# Altium PCB Control_Test_Board.PcbDoc
Units mil, origin at the board's own origin, x right, y up, seen from the top; angles counter-clockwise.
Board outline 2100 x 1625 mil, 2 copper layers (Top Layer, Bottom Layer); 34 components, 53 nets, 201 pads, 72 vias.
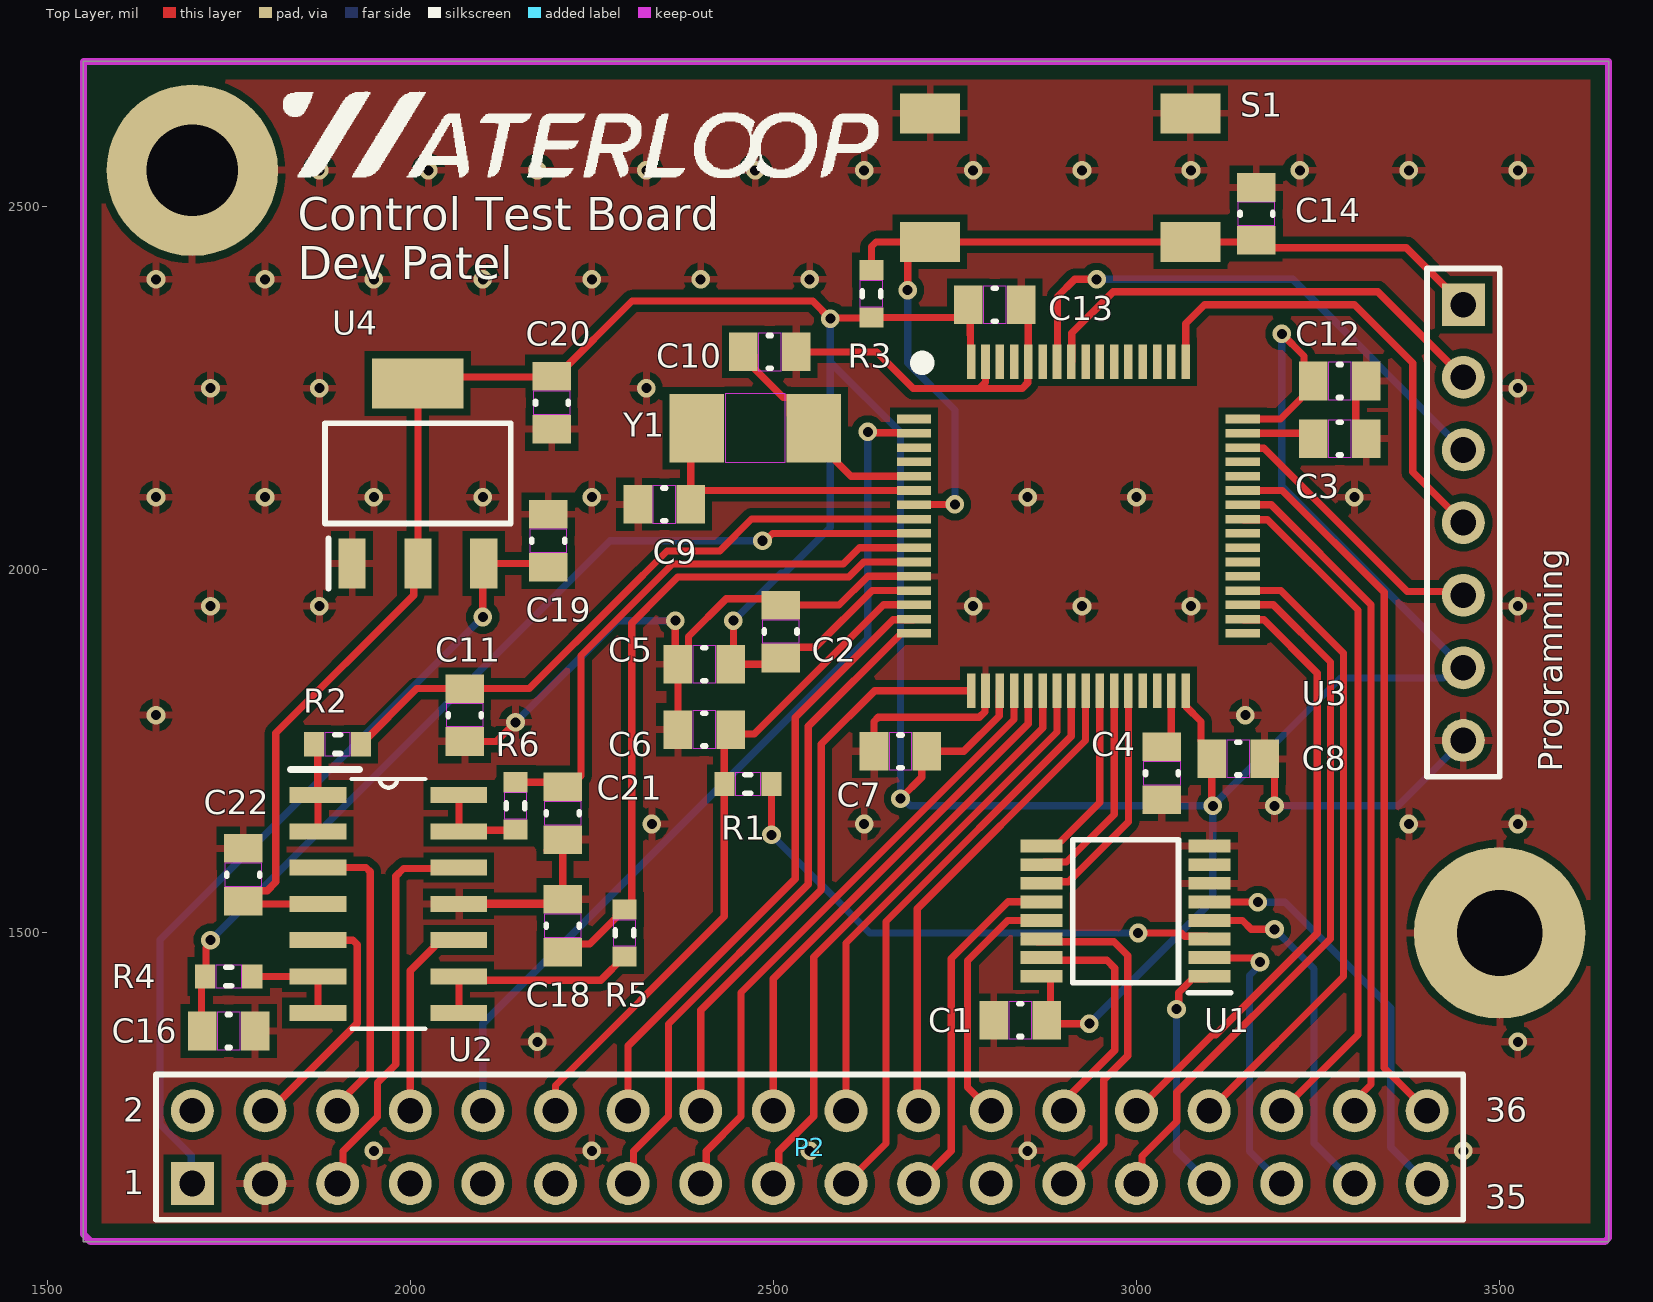
[diagram p0: Top Layer view]
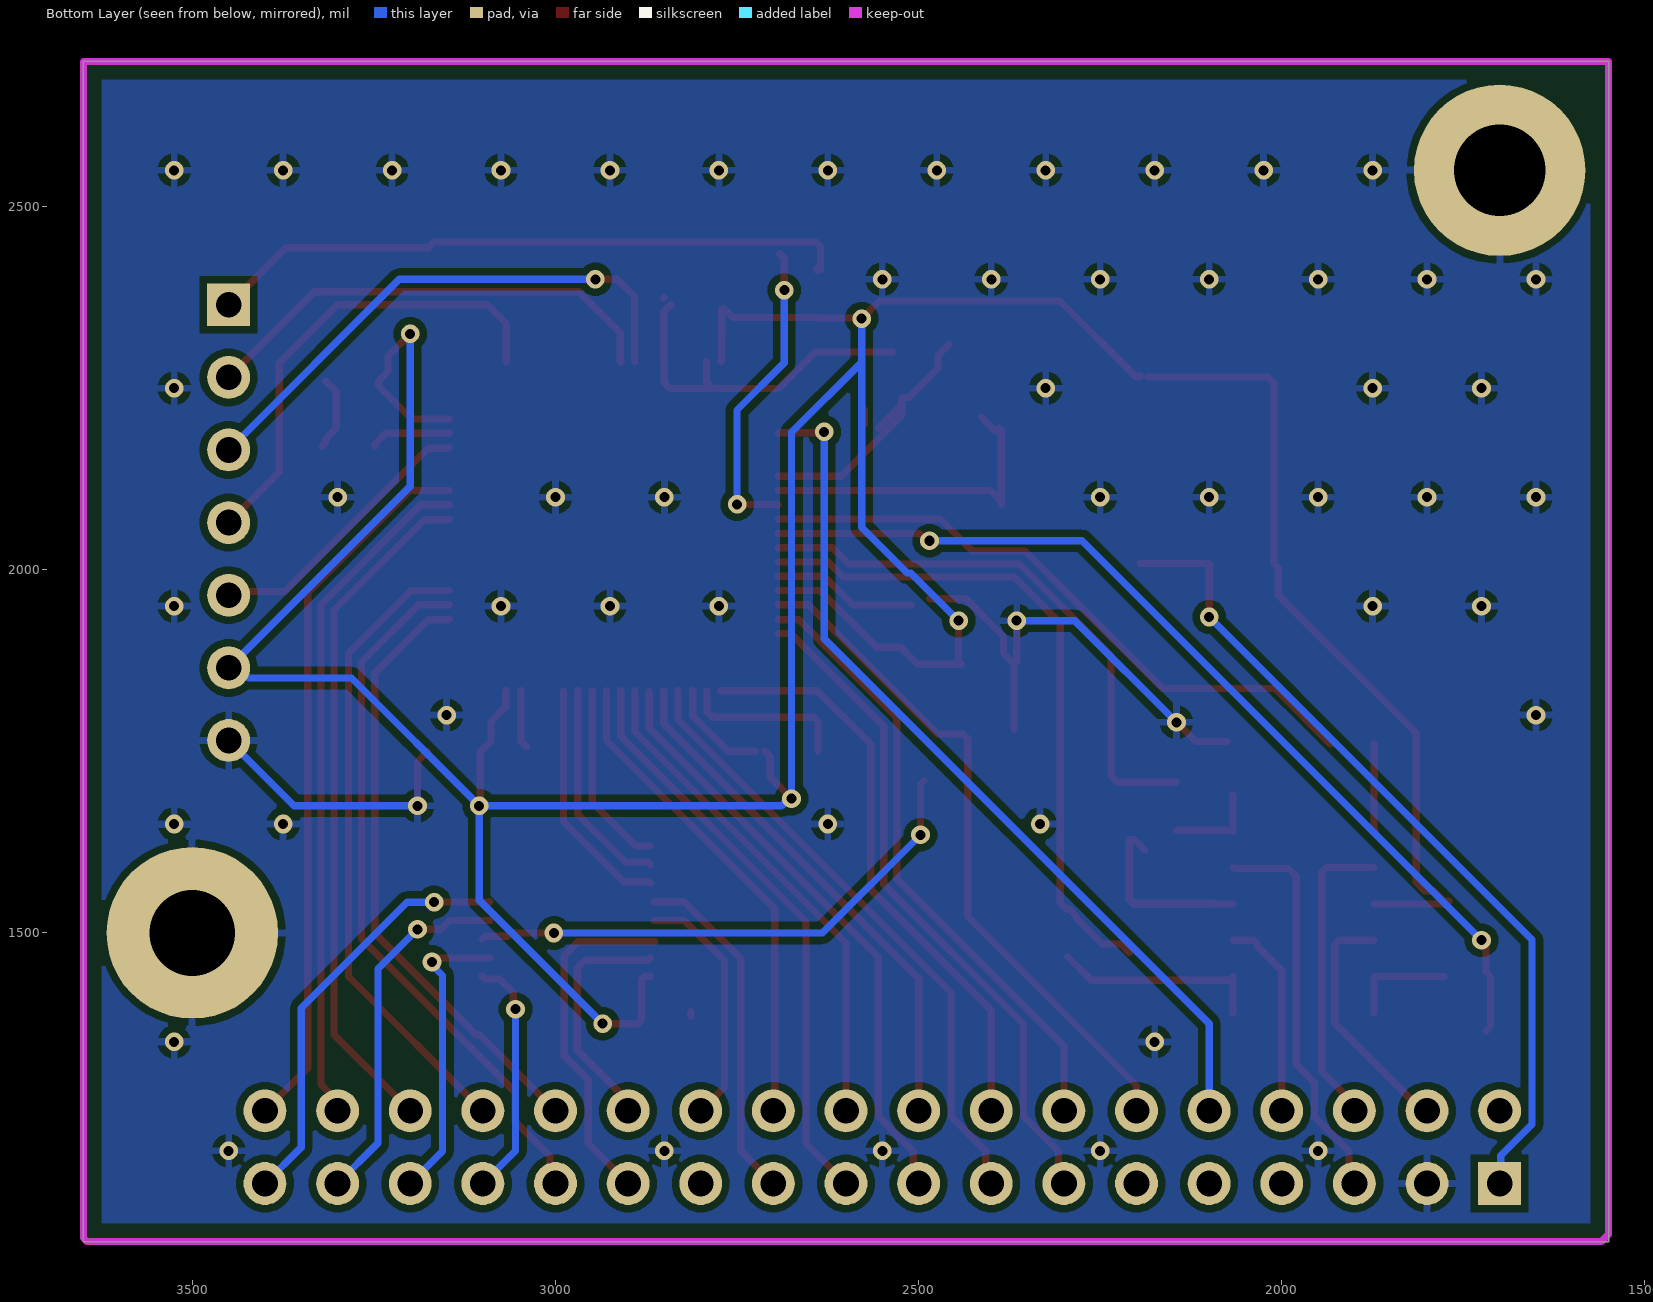
[diagram p1: Bottom Layer view, seen from below]
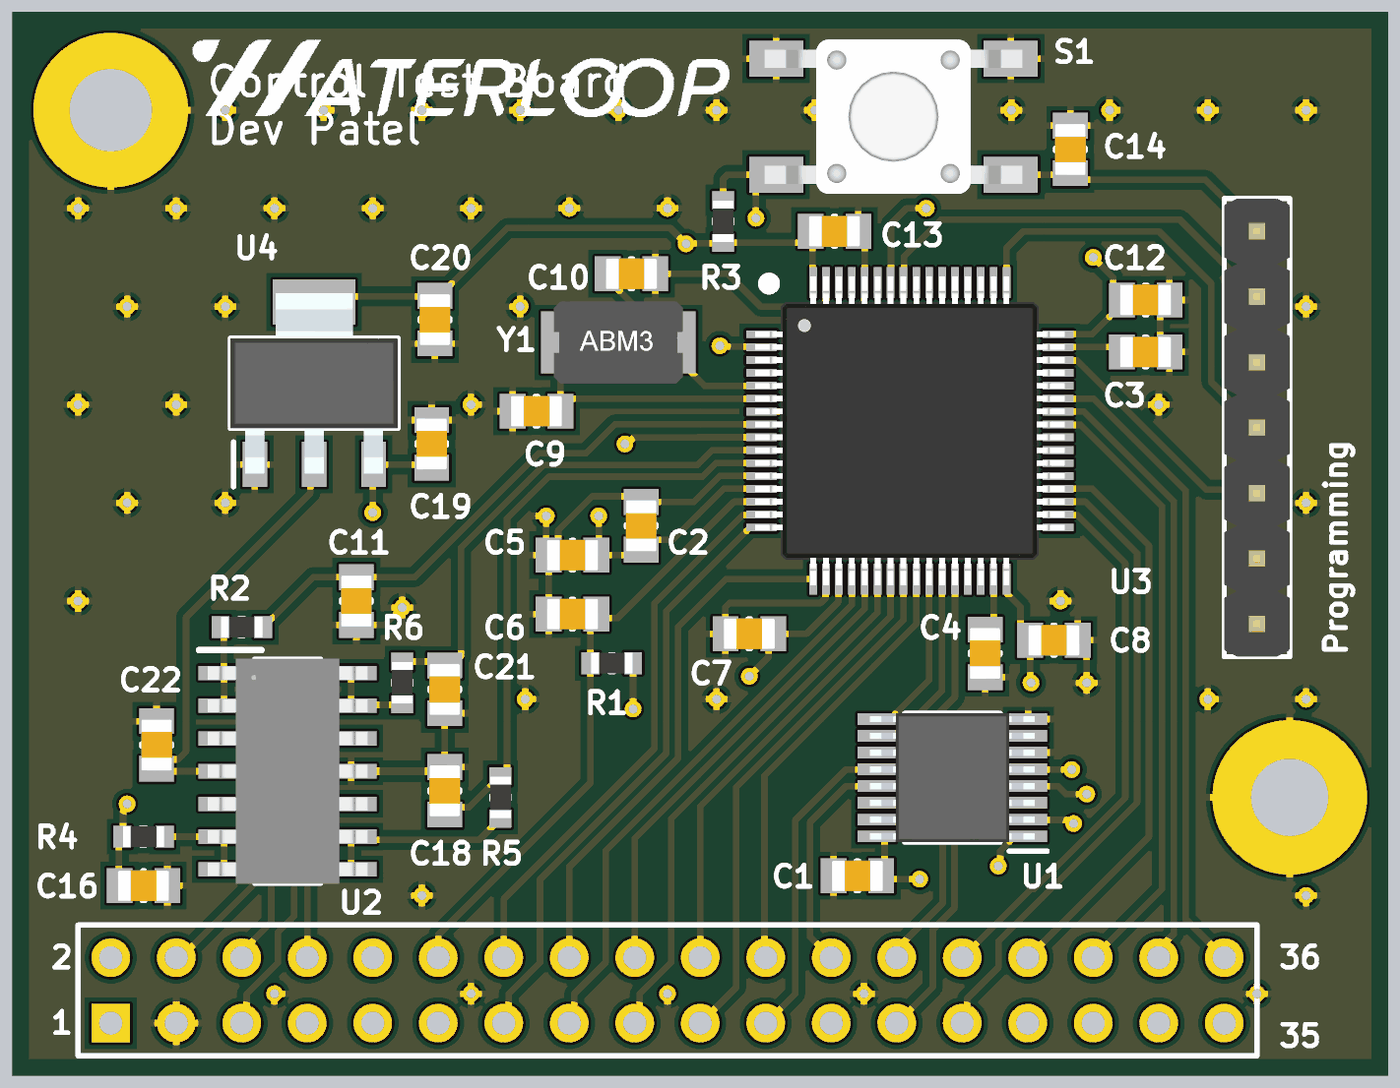
[diagram p2: 3D render of the assembled board from above, using the file's embedded part models]

## Layer stack, top to bottom
Top Solder: solder mask 0.4, Solder Resist, Dk 3.5
Top Layer: signal copper 1.4
Dielectric 1: dielectric 12.6, FR-4, Dk 4.8
Bottom Layer: signal copper 1.4
Bottom Solder: solder mask 0.4, Solder Resist, Dk 3.5

## Board outline
1550,1075 3650,1075 3650,2700 1550,2700

## Design rules (kind name [scope] priority, off if disabled: settings)
Clearance [All] p1: gap=10 ignorepadtopadclearanceinfootprint=TRUE except(0: Arc-Hole Track-Hole SMDPad-Hole THPad-Hole Via-Hole Fill-Hole Poly-Hole Region-Hole Text-Hole; 8: Arc-Arc Arc-Track Arc-SMDPad Track-Track Track-SMDPad)
PolygonConnect [All] p1: connectstyle=Relief reliefconductorwidth=10 reliefentries=4 polygonreliefangle="90 Angle" airgapwidth=10
RoutingVias [All] p1: holewidth=13.78 width=25.59 viastyle="Through Hole" minholewidth=13.78 minwidth=25.59 maxholewidth=137.8 maxwidth=248.03
SolderMaskExpansion [All] p1: expansion=4 istentingtop=FALSE
Width [All] p1: maxlimit=20 minlimit=10 preferedwidth=10 minimp=50.000000 maximp=50.000000 favimp=50.000000
30 further rules are at their usual default settings.

## Components (designator, comment, footprint, x,y, rotation, side; value= is the part's Value field where it differs from the comment)
C1 "Capacitor - Nonpolarized" "0805 - Capacitor" 2840,1380 r180 top value=0.1uF
C2 "10V" "0805 - Capacitor" 2510,1915 r90 top value=10nF
C3 "Capacitor - Nonpolarized" "0805 - Capacitor" 3280,2180.61 r180 top value=2.2uF
C4 "Capacitor - Nonpolarized" "0805 - Capacitor" 3035,1720 r270 top value=2.2uF
C5 "100V" "0805 - Capacitor" 2405,1870 r180 top value=1uF
C6 "Capacitor - Nonpolarized" "0805 - Capacitor" 2405,1780 r0 top value=0.1uF
C7 "100V" "0805 - Capacitor" 2675,1750 r180 top value=0.1uF
C8 "100V" "0805 - Capacitor" 3140,1740 r0 top value=0.1uF
C9 "100V" "0805 - Capacitor" 2350,2090 r180 top value=27pF
C10 "100V" "0805 - Capacitor" 2495,2300 r0 top value=27pF
C11 "Capacitor - Nonpolarized" "0805 - Capacitor" 2075,1800 r90 top value=47nF
C12 "100V" "0805 - Capacitor" 3280,2260 r0 top value=0.1uF
C13 "100V" "0805 - Capacitor" 2805,2365 r0 top value=0.1uF
C14 "100V" "0805 - Capacitor" 3165,2490 r90 top value=0.1uF
C16 "Capacitor - Nonpolarized" "0805 - Capacitor" 1750,1365 r180 top value=47nF
C18 "Capacitor - Nonpolarized" "0805 - Capacitor" 2210,1510 r270 top value=47nF
C19 "Capacitor - Nonpolarized" "0805 - Capacitor" 2190,2040 r270 top value=10uF
C20 "Capacitor - Nonpolarized" "0805 - Capacitor" 2195,2230 r90 top value=10uF
C21 "Capacitor - Nonpolarized" "0805 - Capacitor" 2210,1665 r90 top value=47nF
C22 "Capacitor - Nonpolarized" "0805 - Capacitor" 1770,1580 r90 top value=0.1uF
P2 "Header 18X2" HDR2X18 1700,1155 r0 top
Programming "Programming" HDR1X7 3450,2365 r270 top (schematic designator P1)
R1 "Resistor" "0603 - Resistor" 2465,1705 r0 top value=100
R2 "Resistor" "0603 - Resistor" 1900,1760 r0 top value=500m
R3 "10k" "0603 - Resistor" 2635,2380 r90 top
R4 "Resistor" "0603 - Resistor" 1750,1440 r180 top value=500m
R5 "Resistor" "0603 - Resistor" 2295,1500 r90 top value=500m
R6 "Resistor" "0603 - Resistor" 2145,1675 r90 top value=500m
S1 "Switch - Push Button" "6x6mm Switch" 2895,2540 r180 top
U1 "NX3L4051PW,118" SOP65P640X120-16N 2985,1530 r180 top
U2 "LM324AMX/NOPB" LM324AMX/NOPB 1970,1540 r0 top
U3 "STM32F405RGT6" STM32F405RG 2920,2060 r270 top
U4 "TLV1117-33IDCYR" TLV1117 2010.57,2132.74 r90 top
Y1 "Oscillator" "2-SMD NO LEAD CRSYSTAL" 2475,2195 r0 top value=16MHz

## Footprints (in the part's own frame and the unit in brackets; to place one, negate y for a bottom-side part, rotate by r counter-clockwise, add the part's x,y. Pads: shape width x height; smd on the part's side, far side on the other; paste and mask are expansions set on the pad)
"2-SMD NO LEAD CRSYSTAL" [mm]
  rect 1.9x2.4 smd: 1(-2.05,0) 2(2.05,0)
  Top Layer keep-out region: -1.05,1.2 -1.05,-1.2 1.05,-1.2 1.05,1.2
  body extent -2.5,-1.6 2.5,1.6, height 1.3
"6x6mm Switch" [mm]
  rect 2.1x1.4 smd: 1(-4.55,2.25) 1(4.55,2.25) 2(-4.55,-2.25) 2(4.55,-2.25)
  body extent -5,-3 5,3, height 5.12
"0603 - Resistor" [mm] "0603 Chip Resistor - IPC Medium Density"
  rect 0.7x0.85 smd: 1(-0.825,0) 2(0.825,0)
  Top Layer keep-out region: -0.45,0.4 -0.45,-0.4 0.45,-0.4 0.45,0.4
  silkscreen extent -0.1,-0.33 0.1,0.33, body extent -0.8,-0.4 0.8,0.4, height 0.45
"0805 - Capacitor" [mm] "0805 Chip Capacitor - IPC Medium Density"
  rect 1x1.35 smd: 1(-0.925,0) 2(0.925,0)
  Top Layer keep-out region: -0.4,0.65 -0.4,-0.65 0.4,-0.65 0.4,0.65
  silkscreen extent -0.05,-0.58 0.05,0.58, body extent -1,-0.6 1,0.6, height 1.2
HDR1X7 [mm] "Connector; Header; 7 Position"
  rect 1.5x1.5 hole 0.9: 1(0,0)
  round 1.5 hole 0.9: 2(2.54,0) 3(5.08,0) 4(7.62,0) 5(10.16,0) 6(12.7,0) 7(15.24,0)
  silkscreen extent -1.27,-1.27 16.51,1.27, body extent -1.27,-1.27 16.51,1.27, height 8.54
HDR2X18 [mm] "Connector; Header; 18x2 Position"
  rect 1.5x1.5 hole 0.9: 1(0,0)
  round 1.5 hole 0.9: 2(0,2.54) 3(2.54,0) 4(2.54,2.54) 5(5.08,0) 6(5.08,2.54) 7(7.62,0) 8(7.62,2.54) 9(10.16,0) 10(10.16,2.54) 11(12.7,0) 12(12.7,2.54) 13(15.24,0) 14(15.24,2.54) 15(17.78,0) 16(17.78,2.54) 17(20.32,0) 18(20.32,2.54) 19(22.86,0) 20(22.86,2.54) 21(25.4,0) 22(25.4,2.54) 23(27.94,0) 24(27.94,2.54) 25(30.48,0) 26(30.48,2.54) 27(33.02,0) 28(33.02,2.54) 29(35.56,0) 30(35.56,2.54) 31(38.1,0) 32(38.1,2.54) 33(40.64,0) 34(40.64,2.54) 35(43.18,0) 36(43.18,2.54)
  silkscreen extent -1.27,-1.27 44.45,3.81
LM324AMX/NOPB [mil] "Gen Purp 4Ch Opamp"
  rect 78x22 smd: 1(-97,150) 2(-97,100) 3(-97,50) 4(-97,0) 5(-97,-50) 6(-97,-100) 7(-97,-150) 8(97,-150) 9(97,-100) 10(97,-50) 11(97,0) 12(97,50) 13(97,100) 14(97,150)
  silkscreen extent -135,-172 51,185, body extent -122,-172 122,172, height 69
SOP65P640X120-16N [mm]
  rect 1.475x0.45 smd: 1(-2.938,2.275) 2(-2.938,1.625) 3(-2.938,0.975) 4(-2.938,0.325) 5(-2.938,-0.325) 6(-2.938,-0.975) 7(-2.938,-1.625) 8(-2.938,-2.275) 9(2.938,-2.275) 10(2.938,-1.625) 11(2.938,-0.975) 12(2.938,-0.325) 13(2.938,0.325) 14(2.938,0.975) 15(2.938,1.625) 16(2.938,2.275)
  silkscreen extent -3.67,-2.5 1.85,2.85, body extent -3.2,-2.5 3.2,2.5, height 1.2
STM32F405RG [mm]
  rect 0.3x1.2 smd: 1(-3.75,-5.75) 2(-3.25,-5.75) 3(-2.75,-5.75) 4(-2.25,-5.75) 5(-1.75,-5.75) 6(-1.25,-5.75) 7(-0.75,-5.75) 8(-0.25,-5.75) 9(0.25,-5.75) 10(0.75,-5.75) 11(1.25,-5.75) 12(1.75,-5.75) 13(2.25,-5.75) 14(2.75,-5.75) 15(3.25,-5.75) 16(3.75,-5.75) 33(3.75,5.75) 34(3.25,5.75) 35(2.75,5.75) 36(2.25,5.75) 37(1.75,5.75) 38(1.25,5.75) 39(0.75,5.75) 40(0.25,5.75) 41(-0.25,5.75) 42(-0.75,5.75) 43(-1.25,5.75) 44(-1.75,5.75) 45(-2.25,5.75) 46(-2.75,5.75) 47(-3.25,5.75) 48(-3.75,5.75)
  rect 1.2x0.3 smd: 17(5.75,-3.75) 18(5.75,-3.25) 19(5.75,-2.75) 20(5.75,-2.25) 21(5.75,-1.75) 22(5.75,-1.25) 23(5.75,-0.75) 24(5.75,-0.25) 25(5.75,0.25) 26(5.75,0.75) 27(5.75,1.25) 28(5.75,1.75) 29(5.75,2.25) 30(5.75,2.75) 31(5.75,3.25) 32(5.75,3.75) 49(-5.75,3.75) 50(-5.75,3.25) 51(-5.75,2.75) 52(-5.75,2.25) 53(-5.75,1.75) 54(-5.75,1.25) 55(-5.75,0.75) 56(-5.75,0.25) 57(-5.75,-0.25) 58(-5.75,-0.75) 59(-5.75,-1.25) 60(-5.75,-1.75) 61(-5.75,-2.25) 62(-5.75,-2.75) 63(-5.75,-3.25) 64(-5.75,-3.75)
  silkscreen extent -5.79,-5.54 -5.64,-5.39, body extent -6,-6 6,6, height 1.5
TLV1117 [mm] "SOT230P700X180-4N"
  rect 1.75x0.95 smd: 1(-3.15,2.3) 2(-3.15,0) 3(-3.15,-2.3)
  rect 1.75x3.2 smd: 2(3.15,0)
  silkscreen extent -4.03,-3.25 1.75,3.25, body extent -3.5,-3.25 3.5,3.25, height 1.8

## Part data
C1 C6 C22: "Nonpolarized Capacitor", Supplier Part Number=311-1141-1-ND
C2: library part "Capacitor - Nonpolarized", "Nonpolarized Capacitor", Supplier Part Number=311-1475-1-ND
C3 C4: "Nonpolarized Capacitor", Supplier Part Number=311-3420-1-ND
C5: library part "Capacitor - Nonpolarized", "Nonpolarized Capacitor", Supplier Part Number=311-1456-1-ND
C7 C8 C12 C13 C14: library part "Capacitor - Nonpolarized", "Nonpolarized Capacitor", Supplier Part Number=311-1141-1-ND
C9 C10: library part "Capacitor - Nonpolarized", "Nonpolarized Capacitor", Supplier Part Number=311-1104-1-ND
C11 C16 C18 C21: "Nonpolarized Capacitor", Supplier Part Number=311-1431-1-ND
C19 C20: "Nonpolarized Capacitor", Supplier Part Number=13-CC0805KFX7R6BB106CT-ND
P2: "Header, 18-Pin, Dual row", LatestRevisionDate=17-Jul-2002, LatestRevisionNote="Re-released for DXP Platform.", Publisher="Altium Limited"
Programming: library part "1x7 Header", "1x7 Pin Header"
R1: Supplier Part Number=311-100HRCT-ND
R2 R4 R5 R6: Supplier Part Number=13-RL0603JR-070R5LCT-ND
R3: library part Resistor, "Resistor", Supplier Part Number=311-10.0KHRCT-ND
S1: "Push Button Switch"
U1: "8:1 MUX", Manufacturer=NXP, Supplier Part Number=568-12393-1-ND, ComponentLink1Description=Datsheet, ComponentLink1URL=https://www.nxp.com/docs/en/data-sheet/NX3L4051.pdf, Manufacturer Part Number=NX3L4051PW,118, Supplier=Digikey
U2: "Gen Purp 4Ch Opamp", Manufacturer=TI, Supplier Part Number=LM324AMX/NOPBCT-ND, ComponentLink1Description=Datasheet, ComponentLink1URL=https://www.ti.com/lit/ds/symlink/lm124-n.pdf?HQS=dis-dk-null-digikeymode-dsf-pf-null-wwe&ts=1616555832552, Manufacturer Part Number=LM324AMX/NOPB, Supplier=Digikey
U3: "ST 64-pin Micro", Manufacturer=ST, Manufacturer Part Number=STM32F405RG, Supplier Part Number=497-11767-ND, ComponentLink1Description=Datsheet, ComponentLink1URL=https://www.st.com/content/ccc/resource/technical/document/datasheet/ef/92/76/6d/bb/c2/4f/f7/DM00037051.pdf/files/DM00037051.pdf/jcr:content/translations/en.DM00037051.pdf, Supplier=Digikey
U4: "Linear Voltage Regulator IC 3.3V 800MA SOT223-4", Manufacturer="Texas Instruments", Supplier Part Number=296-21112-1-ND, ComponentLink1Description=Datasheet, ComponentLink1URL=http://www.ti.com/lit/ds/symlink/tlv1117.pdf?HQS=TI-null-null-digikeymode-df-pf-null-wwe&ts=1590668900314, Manufacturer Part Number=TLV1117-33IDCYR, Supplier=Digikey
Y1: "Crystal Oscillator", Supplier Part Number=535-13460-1-ND

## Free pads (board coordinates)
  round 236.22 hole 125.98: 9(1700,2550)
  round 236.22 hole 118.11: 10(3500,1500)

## Via types
v1: diameter 25.59, hole 13.78, Top Layer to Bottom Layer, 72 vias

## Nets (pads, with @x,y where several pads share a name; then routed paths per layer and width w, separated by ;. In a path a pad name is that pad's centre, name@x,y a point inside that pad or via, vN(x,y) a via of type N, cw(c..) or ccw(c..) an arc to the next point about the centre after c; other vN are vias at no path point)
3V3: C1.1 C2.1 C5.1 C7.1 C8.1 C12.1 C13.1 C20.2 C22.1 Programming.6 R3.1 U1.16 U2.4 U3.13 U3.19 U3.32 U3.48 U3.64 U4.2 | length 5795.5
  Top Layer w10: C22.1 1776.89,1543.58 1791.33,1558.03 1803.03,1558.03 1815,1570 1815,1775.39 2004.74,1965.13 2004.74,2002.9 2010.57,2008.72 2010.57,2256.75 2019.39,2265.57 C20.2@2185,2265.57 ; C22.1@1773.58,1540 U2.4 ; C20.2 2201.89,2266.42 2305.47,2370 2554.22,2370 v1(2578.36,2345.86) 2579.19,2346.69 2639.17,2346.69 2640,2347.52 2756.1,2347.52 C13.1@2768.58,2360 ; v1(2445,1930) 2445,1873.58 C5.1 2445,1870 2501.42,1870 C2.1 2524.69,1893.27 2557.81,1893.27 2635.96,1971.42 U3.13 ; v1(2675,1685) 2704.28,1714.28 2704.28,1742.87 C7.1 ; C7.1@2725,1750 2762.11,1750 2810.95,1798.84 2810.95,1832.84 U3.19 ; C13.1@2771.24,2357.97 2771.24,2323.43 2771.46,2323.21 2771.46,2287.28 U3.64 ; U1.16 2877.56,1440.43 2881.42,1436.57 2881.42,1380 2886.42,1375 v1(2935,1375) ; U3.32 3068.54,1832.72 3068.54,1811.46 3088.9,1791.1 3088.9,1764.21 3103.58,1749.53 3103.58,1676.42 v1(3105,1675) ; U3.48 3198.11,2207.64 3243.58,2253.11 C12.1 3230.55,2273.03 3230.55,2294.45 v1(3200,2325)
  Bottom Layer w10: v1(2445,1930) 2510.67,1995.67 2515.67,1995.67 2578.36,2058.36 2578.36,2285.95 ; v1(2578.36,2345.86) 2578.36,2285.95 ; v1(2935,1375) 3105,1545 v1(3105,1675) ; v1(3200,2325) 3200,2115 Programming.6 3436.73,1865 3422.74,1851.01 3281.01,1851.01 v1(3105,1675) ; 2578.36,2285.95 2675,2189.31 v1(2675,1685) 2678.65,1685 2688.65,1675 v1(3105,1675)
5V: C19.2 P2.1 U4.3 | length 1150.7
  Top Layer w10: v1(2100,1935) 2100,2007.6 U4.3 2101.26,2008.58 C19.2@2195,2008.58
  Bottom Layer w10: P2.1 1698.36,1156.64 1698.36,1193.67 1655.47,1236.56 1655.47,1490.47 1881.24,1716.24 v1(2100,1935)
ADC1: P2.14 U3.15 | length 856.6
  Top Layer w10: P2.14 2300,1344.57 2530,1574.57 2530,1796.65 2657,1923.65 2664.62,1931.27 2692.84,1931.27 U3.15
ADC3: P2.13 U3.16 | length 930.8
  Top Layer w10: P2.13 2307.5,1162.5 2307.5,1199.53 2355.47,1247.5 2355.47,1374.59 2548,1567.12 2548,1784.46 2675.91,1912.36 U3.16
ADC_TEMP: C6.2 P2.12 R1.1 U3.14 | length 946.2
  Top Layer w10: P2.12 2200,1290 2432.52,1522.52 R1.1 2432.52,1767.52 2438.83,1773.83 2473.83,1773.83 2651.73,1951.73 U3.14
ADC_VA: C11.2 R2.2 U3.8 | length 889.6
  Top Layer w10: R2.2 2008.9,1836.42 C11.2 2163.94,1836.42 2289,1961.48 2353.52,2026 2426,2026 2470,2070 2693.46,2070 U3.8
ADC_VB: C16.2 R4.2 U3.9 | length 1333.4
  Top Layer w10: C16.2@1718.58,1365 1712.52,1371.06 1712.52,1440 1718.76,1446.24 1718.76,1479.54 1725,1485.78 v1(1725,1490) ; v1(2485,2040) 2488.65,2040 2498.65,2050 2596.36,2050 2596.48,2050.12 2693.58,2050.12 U3.9
  Bottom Layer w10: v1(1725,1490) 2275.06,2040.06 2484.94,2040.06 v1(2485,2040)
ADC_VC: C18.2 R5.2 U3.11 | length 933.6
  Top Layer w10: C18.2 2221.19,1484.77 2247.29,1484.77 2283.27,1520.75 2283.27,1523.7 2292.05,1532.48 2296.22,1532.48 2305,1541.26 2305,1926.57 2348.43,1970 2368.43,1990 2603.63,1990 2624.42,2010.79 U3.11
ADC_VDC: C21.2 R6.2 U3.10 | length 779.6
  Top Layer w10: R6.2 2226.38,1707.48 2235,1716.1 2235,1882.02 2277,1924.02 2360.98,2008 2596.18,2008 2618.65,2030.47 U3.10
BUFFER_A: R2.1 U2.1 U2.2 | length 122
  Top Layer w10: U2.2@1871.74,1641.26 U2.2 U2.1 1872.52,1690.48 R2.1@1872.52,1760
BUFFER_B: R4.1 U2.6 U2.7 | length 147.1
  Top Layer w10: R4.1@1775.91,1440 U2.6 U2.7
BUFFER_C: R5.1 U2.8 U2.9 | length 298.5
  Top Layer w10: U2.8 U2.9 ; U2.9@2067,1435 U2.9 ; R5.1 2262.48,1435 2072,1435 U2.9
BUFFER_DC: R6.1 U2.13 U2.14 | length 128.5
  Top Layer w10: U2.14 U2.13 2068.26,1641.26 R6.1@2145,1641.26
CS_DRIVER: P2.10 U3.2 | length 1219
  Top Layer w10: v1(2630,2190) 2631.27,2188.73 2692.84,2188.73 U3.2
  Bottom Layer w10: P2.10 2100,1375 2630,1905 v1(2630,2190)
EN_DRIVER: P2.19 U3.24 | length 807.1
  Top Layer w10: P2.19 2655,1210 2655,1515.61 2910.16,1770.77 U3.24
GND: C1.2 C2.2 C3.1 C4.2 C5.2 C6.1 C7.2 C8.2 C9.2 C10.2 C11.1 C12.2 C13.2 C14.2 C16.1 C18.1 C19.1 C20.1 C21.1 C22.2 P2.3 pad.9 pad.10 Programming.7 S1.2 U1.6 U1.8 U2.11 U3.12 U3.18 U3.60 U3.63 U4.1 | length 2335.5
  Top Layer w10: U2.11 U2.11@2095,1540 ; C11.1 2118.58,1763.58 v1(2145,1790) ; C21.1@2188.43,1613.9 2203.11,1628.58 C21.1 C18.1 ; v1(2365,1930) 2365,1873.58 C5.2 ; C6.1 C5.2 ; C2.2@2485.16,1960 2435,1960 2383.27,1908.27 2383.27,1884.69 C5.2 ; C2.2 2590.51,1951.42 2630.19,1991.1 U3.12 ; C10.2@2536.42,2300 2642.26,2300 2692.5,2249.76 2783.65,2249.76 ; C7.2 2638.58,1791.14 2644.44,1797 2783.65,1797 2791.27,1804.62 2791.27,1832.84 U3.18 ; U3.63 2792.05,2258.15 2783.65,2249.76 ; C1.2@2813.58,1385 C1.2@2813.58,1391.89 ; C13.2 2851.1,2355.31 U3.60 2850.32,2285.6 2850.32,2257.37 2842.71,2249.76 2783.65,2249.76 ; C13.2@2851.1,2374.69 C13.2@2851.42,2375 ; C8.2@3176.42,1749.53 3190,1735.94 v1(3190,1675) ; C3.1@3316.42,2175 C3.1@3321.42,2170 ; C3.1 3302,2195.03 3302,2245.58 C12.2
  Top Layer w12: U2.11@2095,1540 2203.58,1540 C18.1
  Bottom Layer w10: v1(2145,1790) 2285,1930 v1(2365,1930) ; v1(3190,1675) 3360,1675 Programming.7
  other v1: 1950,1200 2250,1200 2550,1200 2850,1200 3450,1200 2175,1350 3525,1350 2332.8,1650 2625,1650 3375,1650 3525,1650 1650,1800 3150,1800 1725,1950 1875,1950 2775,1950 2925,1950 3075,1950 3525,1950 1650,2100 1800,2100 1950,2100 2100,2100 2250,2100 2850,2100 3000,2100 3300,2100 1725,2250 1875,2250 2325,2250 3525,2250 1650,2400 1800,2400 1950,2400 2100,2400 2250,2400 2400,2400 2550,2400 1875,2550 2025,2550 2175,2550 2325,2550 2475,2550 2625,2550 2775,2550 2925,2550 3075,2550 3225,2550 3375,2550 3525,2550
GPIO1: U1.11 U3.28 | length 335.2
  Top Layer w10: U1.11 2871.48,1570.54 2906.29,1570.54 2988.9,1653.15 U3.28
GPIO2: U1.10 U3.27 | length 299
  Top Layer w10: U1.10 2873.06,1597.71 2903.75,1597.71 2969.21,1663.17 U3.27
GPIO3: U1.9 U3.26 | length 259.1
  Top Layer w10: U1.9 2889.51,1619.57 2949.53,1679.59 U3.26
INHA: P2.32 U3.41 | length 939.1
  Top Layer w10: U3.41 3147.16,2069.06 3180.48,2069.06 3305,1944.54 3305,1360 3210.72,1265.72 P2.32@3210.72,1255
INHB: P2.34 U3.42 | length 940.1
  Top Layer w10: U3.42 3185.47,2089.53 3323,1952 3323,1291.27 3300,1268.27 P2.34
INHC: P2.36 U3.43 | length 991.1
  Top Layer w10: U3.43 3200.79,2109.21 3341,1969 3341,1314 P2.36
INLA: P2.28 U3.34 | length 841.8
  Top Layer w10: P2.28 3104.76,1359.76 3109.06,1359.76 3249,1499.69 3249,1857.65 3175.39,1931.27 3147.16,1931.27 U3.34
INLB: P2.27 U3.35 | length 981.8
  Top Layer w10: P2.27 3007.5,1162.5 3007.5,1192.5 3055.47,1240.47 3055.47,1280.47 3267,1492 3267,1873 3188.27,1951.73 U3.35
INLC: P2.30 U3.36 | length 881
  Top Layer w10: P2.30 3285,1440 3285,1885 3198.58,1971.42 U3.36
ISENA: P2.15 U3.20 | length 857.3
  Top Layer w10: P2.15 2407.5,1162.5 2407.5,1199.53 2455.47,1247.5 2455.47,1417.91 2831.42,1793.85 U3.20
ISENB: P2.22 U3.25 | length 675.5
  Top Layer w10: P2.22 2698,1257 2698,1533.16 2929.84,1765 U3.25
ISENC: P2.16 U3.17 | length 810.7
  Top Layer w10: P2.16 2400,1393.66 2566,1559.66 2566,1760.09 2639.53,1833.62 U3.17
MISO: P2.17 U3.22 | length 830.6
  Top Layer w10: P2.17 2507.5,1162.5 2507.5,1199.53 2555.47,1247.5 2555.47,1467 2870.79,1782.31 U3.22@2870.79,1832.06
MOSI: P2.20 U3.23 | length 698.9
  Top Layer w10: P2.20 2600,1486.07 2890.47,1776.54 U3.23
NetC3_2: C3.2 U3.47 | length 111.6
  Top Layer w10: U3.47 3233.9,2187.95 3248.58,2173.27 C3.2@3248.58,2170
NetC4_1: C4.1 U3.31 | length 80.5
  Top Layer w10: C4.1@3040,1756.42 3047.95,1764.37 U3.31
NetC9_1: C9.1 U3.6 Y1.1 | length 447.3
  Top Layer w10: C9.1 C9.1@2386.42,2094.53 ; Y1.1@2389.29,2195 2386.42,2192.13 C9.1@2386.42,2094.53 ; Y1.1@2393.94,2190.35 Y1.1@2413.58,2210 ; U3.6 2401.1,2109.21 C9.1@2386.42,2094.53
NetC10_1: C10.1 U3.5 Y1.2 | length 400.5
  Top Layer w10: C10.1@2458.58,2310 2473.27,2295.31 2473.27,2277.44 2513.46,2237.24 2523.31,2237.24 Y1.2@2523.31,2227.4 ; Y1.2 Y1.2@2523.31,2227.4 ; Y1.2@2575,2200.16 Y1.2@2575,2219.84 ; U3.5 2606.97,2128.9 2523.31,2212.56 Y1.2@2523.31,2227.4
NetR1_2: R1.2 U1.3 | length 739.3
  Top Layer w10: R1.2@2492.73,1709.75 R1.2 v1(2497.48,1635) ; v1(3002.15,1499.9) 3061.69,1499.9 3066.25,1495.35 3096.94,1495.35 U1.3
  Bottom Layer w10: v1(2497.48,1635) 2632.58,1499.9 v1(3002.15,1499.9)
RESET: C14.1 Programming.1 R3.2 S1.1 U3.7 | length 1319.1
  Top Layer w10: R3.2 2635,2445 2641.42,2451.42 2715.87,2451.42 3074.13,2451.42 3167.13,2451.42 3175,2443.54 3371.46,2443.54 Programming.1 ; R3.2@2640,2412.48 R3.2@2640,2414.53 ; v1(2685,2385) 2685,2428.86 S1.1@2691.17,2435.03 ; U3.7 2693.86,2089.76 2749.76,2089.76 v1(2750,2090)
  Bottom Layer w10: v1(2685,2385) 2685,2285 2750,2220 v1(2750,2090)
RX: Programming.2 U3.57 | length 651.5
  Top Layer w10: U3.57 2910.94,2287.16 2910.94,2325.94 2968,2383 3332,2383 Programming.2
SCLK: P2.18 U3.21 | length 724.1
  Top Layer w10: P2.18 2500,1436.98 2851.1,1788.08 U3.21
SWCLK: Programming.4 U3.49 | length 658
  Top Layer w10: U3.49 3067.64,2339.14 3093.5,2365 3300,2365 3380.31,2284.69 3380.31,2134.69 Programming.4
SWDIO: Programming.5 U3.46 | length 387.8
  Top Layer w10: U3.46 3147.16,2167.49 3175.38,2167.49 3372.87,1970 3445,1970 Programming.5
TEMP_1: P2.24 U1.13 | length 340.1
  Top Layer w10: P2.24 2767.42,1287.58 2767.42,1461.74 2822.88,1517.2 U1.13@2864.33,1517.2
TEMP_2: P2.25 U1.14 | length 483.2
  Top Layer w10: U1.14@2863.06,1487.88 2969.01,1487.88 2988.07,1468.82 2988.07,1330.89 2955,1297.82 2955,1210 P2.25
TEMP_3: P2.26 U1.15 | length 332.3
  Top Layer w10: U1.15 2873.06,1462.29 2959.34,1462.29 2970.07,1451.56 2970.07,1338.35 2900,1268.27 P2.26
TEMP_4: P2.21 U1.12 | length 482.1
  Top Layer w10: P2.21 2745,1200 2745,1464.78 2823.02,1542.8 U1.12@2864.33,1542.8
  Bottom Layer w10: P2.21 P2.21@2700.23,1157.03
TEMP_5: P2.29 U1.1 | length 334.8
  Top Layer w10: v1(3055,1395) 3057.98,1397.98 3057.98,1417.98 3076.57,1436.57 3096.81,1436.57 U1.1
  Bottom Layer w10: v1(3055,1395) 3055,1200 P2.29
TEMP_6: P2.35 U1.5 | length 581.8
  Top Layer w10: U1.5@3090.67,1542.8 3090.81,1542.65 3167.06,1542.65 v1(3167.2,1542.51)
  Bottom Layer w10: v1@3167.49,1542.22 3204.35,1542.22 3350,1396.57 3350,1205 P2.35
TEMP_7: P2.31 U1.2 | length 411.3
  Top Layer w10: U1.2@3090.67,1466.02 3091.18,1465.51 3160.27,1465.51 3165.78,1460 v1(3170,1460)
  Bottom Layer w10: v1(3170,1460) 3170,1455.78 3155.47,1441.25 3155.47,1199.53 P2.31
TEMP_8: P2.33 U1.4 | length 499.9
  Top Layer w10: U1.4@3090.67,1517.2 3145.78,1517.2 3157.99,1505 v1(3190,1505)
  Bottom Layer w10: v1(3190,1505) 3213.76,1481.24 3244.53,1450.47 3244.53,1210.47 P2.33
TX: Programming.3 U3.58 | length 756.1
  Top Layer w10: U3.58 2891.24,2287.15 2891.24,2376.24 2915,2400 v1(2945,2400)
  Bottom Layer w10: v1(2945,2400) 3215,2400 Programming.3
VSENSE_A: P2.6 U2.3 | length 422.2
  Top Layer w10: U2.3 1939.14,1590 1945,1584.14 1945,1309.29 1900,1264.29 P2.6
VSENSE_B: P2.4 U2.5 | length 341.9
  Top Layer w10: P2.4 1806.38,1255 1927,1375.62 1927,1484.14 1921.14,1490 U2.5
VSENSE_C: P2.8 U2.10 | length 279.2
  Top Layer w10: P2.8 2000,1448.07 2033,1481.07 2033,1484 2039,1490 U2.10
VSENSE_DC: P2.5 U2.12 | length 548.1
  Top Layer w10: P2.5 1907.5,1162.5 1907.5,1199.53 1955,1247.03 1955,1293.83 1980,1318.83 1980,1578 1990.86,1588.86 2065.86,1588.86 U2.12
pads on no net: P2.2 P2.7 P2.9 P2.11 P2.23 U1.7 U3.1 U3.3 U3.4 U3.29 U3.30 U3.33 U3.37 U3.38 U3.39 U3.40 U3.44 U3.45 U3.50 U3.51 U3.52 U3.53 U3.54 U3.55 U3.56 U3.59 U3.61 U3.62

## Polygon pours and split planes (outlines as drawn)
GND on Top Layer "GND_L01_P000" (solid, remove dead copper, pour order 0): 1575,2675 3625,2675 3625,1100 1575,1100
GND on Bottom Layer "GND_L02_P001" (solid, remove dead copper, pour order 1): 3625,2675 3625,1100 1575,1100 1575,2675

## Keep-outs
Keep-Out Layer:
  lines w10: 1550,1085 1560,1075 3645,1075 3650,1080 3650,2700 1550,2700 1550,1085

## Silkscreen, mask and mechanical layers (free items; w line width, h text height)
Top Overlay:
  drawing of 10 lines, arcs and shapes, not listed
  text "Control Test Board / Dev Patel" at 1845,2400 h45

## Text inside footprints (layer, text, board x,y; h text height)
P2: Top Overlay "36" at 3480,1240 h33; Top Overlay "35" at 3480,1120 h33; Top Overlay "1" at 1605,1140 h33; Top Overlay "2" at 1605,1240 h33